# EAGLE board Lynx Joystick 7A (EAGLE 7.5.0)
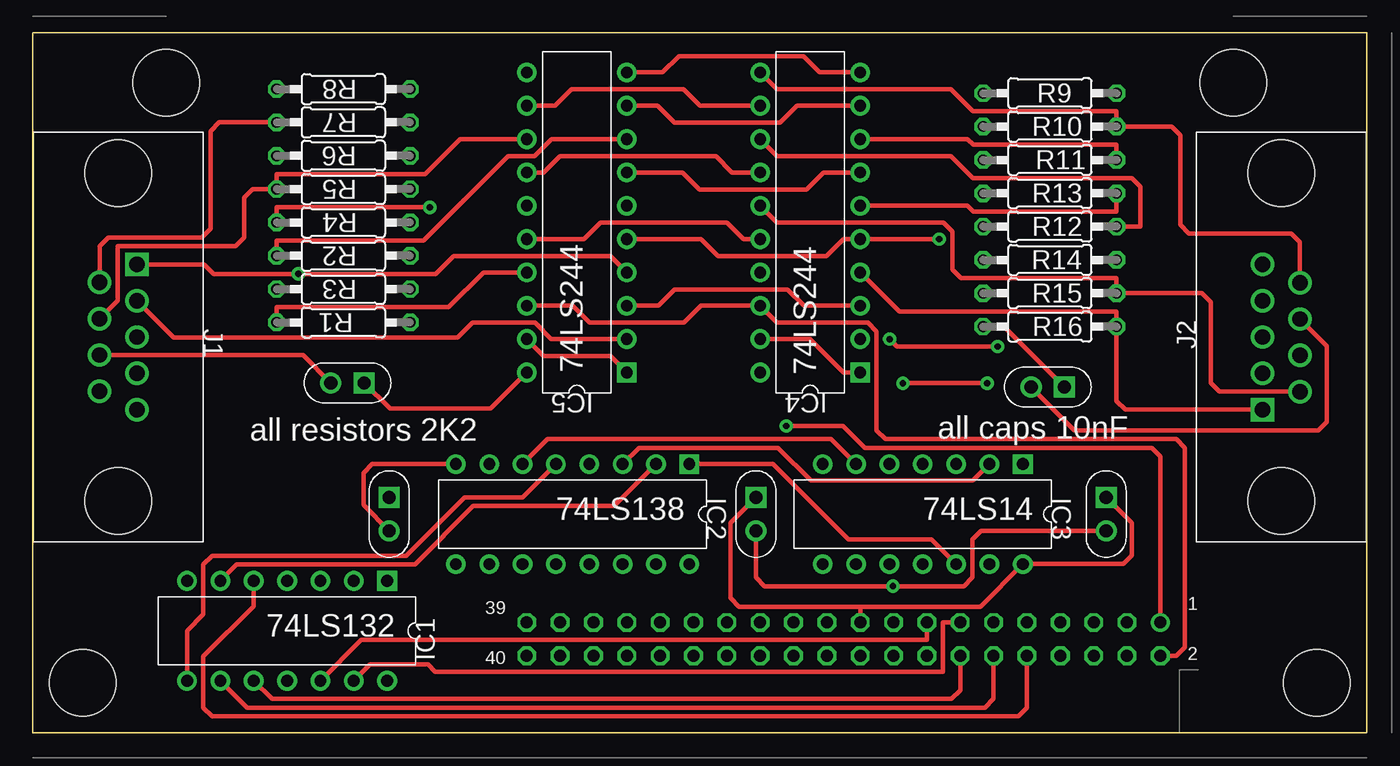
[diagram p0: board, top side]
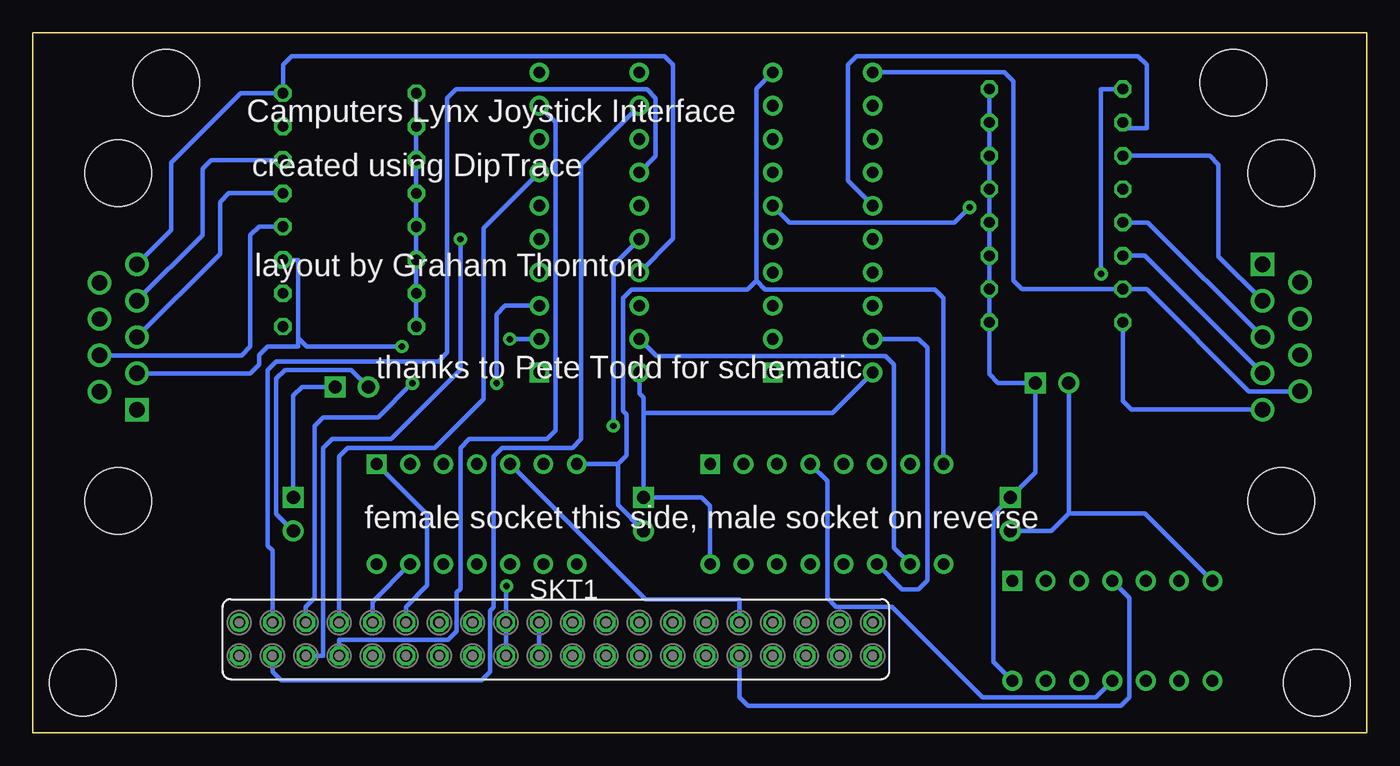
[diagram p1: board, bottom side, seen from below]

Size 101.6 x 53.34 mm. Coordinates in mm from the lower left corner, seen from the top.
Outline: 0,53.34 101.6,53.34 101.6,0 0,0 0,53.34
Copper layers (1*16): Top 0.035mm / dielectric 1.5mm / Bottom 0.035mm
Design rules "default *": minimum track width 10mil, minimum drill 0.61mm, track to track 8mil, track to pad 8mil, pad to pad 8mil, via to via 8mil, smd to smd 8mil, copper to edge 40mil, drill to drill 8mil, minimum pad ring 0mil, minimum via ring 8mil, stop-mask expansion 2mil, vias tented up to drill 19mil, thermal gap 10mil
Net classes: 0 default: width 0.33 mm, clearance 0.33 mm
Holes 5.08 mm at 97.79,3.81 3.81,3.81 10.16,49.53 91.44,49.53

## Footprints (pad centres in the part's own frame; a part is rotated, then mirrored left to right if it is on the bottom)
CAP-2.54/6.6x3 = drill 1 pad 1.6 square: 1 -1.27,0 | drill 1 pad 1.6: 2 1.27,0
DIP-14 = drill 0.9 pad 1.5 square: 1 -3.81,7.62 | drill 0.9 pad 1.5: 2 -3.81,5.08; 3 -3.81,2.54; 4 -3.81,0; 5 -3.81,-2.54; 6 -3.81,-5.08; 7 -3.81,-7.62; 8 3.81,-7.62; 9 3.81,-5.08; 10 3.81,-2.54; 11 3.81,0; 12 3.81,2.54; 13 3.81,5.08; 14 3.81,7.62
DIP-16 = drill 0.9 pad 1.5 square: 1 -3.81,8.89 | drill 0.9 pad 1.5: 2 -3.81,6.35; 3 -3.81,3.81; 4 -3.81,1.27; 5 -3.81,-1.27; 6 -3.81,-3.81; 7 -3.81,-6.35; 8 -3.81,-8.89; 9 3.81,-8.89; 10 3.81,-6.35; 11 3.81,-3.81; 12 3.81,-1.27; 13 3.81,1.27; 14 3.81,3.81; 15 3.81,6.35; 16 3.81,8.89
DIP-20 = drill 0.9 pad 1.5 square: 1 -3.81,11.43 | drill 0.9 pad 1.5: 2 -3.81,8.89; 3 -3.81,6.35; 4 -3.81,3.81; 5 -3.81,1.27; 6 -3.81,-1.27; 7 -3.81,-3.81; 8 -3.81,-6.35; 9 -3.81,-8.89; 10 -3.81,-11.43; 11 3.81,-11.43; 12 3.81,-8.89; 13 3.81,-6.35; 14 3.81,-3.81; 15 3.81,-1.27; 16 3.81,1.27; 17 3.81,3.81; 18 3.81,6.35; 19 3.81,8.89; 20 3.81,11.43
DB9M = drill 1.168 pad 1.778 square: 1 -5.537,1.422 | drill 1.168 pad 1.778: 2 -2.769,1.422; 3 0,1.422; 4 2.769,1.422; 5 5.537,1.422; 6 -4.166,-1.422; 7 -1.397,-1.422; 8 1.372,-1.422; 9 4.14,-1.422 | hole 5.08: 12.497,0; -12.497,0
0207/10 = drill 0.813 pad 1.321 octagon: 1 -5.08,0; 2 5.08,0
FE20-2 = drill 0.914 pad 1.422: 1 -24.13,1.27 | drill 0.914 pad 1.422 octagon: 2 -24.13,-1.27; 3 -21.59,1.27; 4 -21.59,-1.27; 5 -19.05,1.27; 6 -19.05,-1.27; 7 -16.51,1.27; 8 -16.51,-1.27; 9 -13.97,1.27; 10 -13.97,-1.27; 11 -11.43,1.27; 12 -11.43,-1.27; 13 -8.89,1.27; 14 -8.89,-1.27; 15 -6.35,1.27; 16 -6.35,-1.27; 17 -3.81,1.27; 18 -3.81,-1.27; 19 -1.27,1.27; 20 -1.27,-1.27; 21 1.27,1.27; 22 1.27,-1.27; 23 3.81,1.27; 24 3.81,-1.27; 25 6.35,1.27; 26 6.35,-1.27; 27 8.89,1.27; 28 8.89,-1.27; 29 11.43,1.27; 30 11.43,-1.27; 31 13.97,1.27; 32 13.97,-1.27; 33 16.51,1.27; 34 16.51,-1.27; 35 19.05,1.27; 36 19.05,-1.27; 37 21.59,1.27; 38 21.59,-1.27; 39 24.13,1.27; 40 24.13,-1.27

## Placement (x,y rotation side)
C1  CAP  [CAP-2.54/6.6x3]  27.15,16.67 270 top
C2  CAP  [CAP-2.54/6.6x3]  55.09,16.67 270 top
C3  CAP  [CAP-2.54/6.6x3]  81.76,16.67 270 top
C4  CAP  [CAP-2.54/6.6x3]  77.31,26.35 180 top
C5  CAP  [CAP-2.54/6.6x3]  23.97,26.67 180 top
IC1  DM74LS132N  [DIP-14]  19.37,7.78 270 top
IC2  DM74LS138N  [DIP-16]  41.12,16.67 270 top
IC3  DM74LS14N  [DIP-14]  67.79,16.67 270 top
IC4  DM74LS244N  [DIP-20]  59.21,38.89 180 top
IC5  DM74LS244N  [DIP-20]  41.43,38.89 180 top
J1  DB9M  [DB9M]  6.51,30.16 270 top
J2  DB9M  [DB9M]  95.09,30.16 90 top
R1  2K2  [0207/10]  23.65,31.27 180 top
R2  2K2  [0207/10]  23.65,36.35 180 top
R3  2K2  [0207/10]  23.65,33.81 180 top
R4  2K2  [0207/10]  23.65,38.89 180 top
R5  2K2  [0207/10]  23.65,41.43 180 top
R6  2K2  [0207/10]  23.65,43.97 180 top
R7  2K2  [0207/10]  23.65,46.51 180 top
R8  2K2  [0207/10]  23.65,49.05 180 top
R9  2K2  [0207/10]  77.47,48.74 0 top
R10  2K2  [0207/10]  77.47,46.2 0 top
R11  2K2  [0207/10]  77.47,43.66 0 top
R12  2K2  [0207/10]  77.47,38.58 0 top
R13  2K2  [0207/10]  77.47,41.12 0 top
R14  2K2  [0207/10]  77.47,36.04 0 top
R15  2K2  [0207/10]  77.47,33.5 0 top
R16  2K2  [0207/10]  77.47,30.96 0 top
SKT1  FE20-2  [FE20-2]  61.75,7.14 0 bottom

## Library data of the parts
C1-C5 J1 J2 R1-R16 = common
IC1 = common; DATASHEET: http://datasheets.diptrace.com/fairchild/DM74LS132.pdf; MANUFACTURER: Fairchild
IC2 IC3 = common; MANUFACTURER: National Semiconductor
IC4 IC5 = common; DATASHEET: http://datasheets.diptrace.com/fairchild/DM74LS244.pdf; MANUFACTURER: Fairchild
SKT1 = common; OC_FARNELL: unknown; OC_NEWARK: unknown

## Nets
Net_0: C1.2 C2.2 C3.2 C4.2 C5.2 IC1.7 IC2.8 IC3.7 IC4.10 IC5.10 J1.8 J2.8 SKT1.17 SKT1.18
Net_1: IC1.13 SKT1.13
Net_2: IC5.4 J1.1 R8.2
Net_3: IC5.2 J1.2 R6.2
Net_4: IC5.6 J1.3 R4.2
Net_5: IC5.8 J1.4 R2.2
Net_6: IC5.15 J1.6 R7.2
Net_7: IC5.17 J1.5 R1.2
Net_8: IC5.13 J1.7 R5.2
Net_9: IC5.11 J1.9 R3.2
Net_10: IC4.2 J2.2 R14.2
Net_11: IC4.4 J2.1 R16.2
Net_12: IC4.6 J2.3 R13.2
Net_13: IC4.8 J2.4 R11.2
Net_14: IC4.17 J2.5 R9.2
Net_15: IC4.15 J2.6 R15.2
Net_16: IC4.13 J2.7 R12.2
Net_17: IC4.12 IC5.12 SKT1.4
Net_18: IC4.16 IC5.16 SKT1.1
Net_19: IC4.18 IC5.18 SKT1.2
Net_20: IC4.14 IC5.14 SKT1.3
Net_21: IC4.11 J2.9 R10.2
Net_22: IC4.3 IC5.3 SKT1.5
Net_23: IC4.5 IC5.5 SKT1.6
Net_24: IC4.7 IC5.7 SKT1.7
Net_25: IC4.9 IC5.9 SKT1.8
Net_26: IC2.11 IC5.1 IC5.19
Net_27: IC2.10 IC4.1 IC4.19
Net_28: IC1.12 SKT1.15
Net_30: IC1.9 SKT1.12
Net_31: IC1.10 SKT1.14
Net_32: IC1.4 SKT1.32
Net_33: IC1.5 SKT1.10
Net_34: IC1.11 IC2.4
Net_35: IC1.8 IC2.5
Net_36: IC1.6 IC2.2
Net_37: IC3.13 SKT1.9
Net_38: IC3.5 SKT1.31
Net_39: IC3.1 SKT1.11
Net_40: IC2.6 IC3.6
Net_41: IC2.3 IC3.2
Net_42: IC2.1 IC3.12
VCC: C1.1 C2.1 C3.1 C4.1 C5.1 IC1.14 IC2.16 IC3.14 IC4.20 IC5.20 R1.1 R2.1 R3.1 R4.1 R5.1 R6.1 R7.1 R8.1 R9.1 R10.1 R11.1 R12.1 R13.1 R14.1 R15.1 R16.1 SKT1.19 SKT1.20

## Tracks (layer width: path | path; a pad name or v marks a point on that pad's centre or on a via)
Net_0  (via drill 0.49 pad 1.02)
  Top 0.33: C4.2 79.35,23.04 97.9,23.04 98.56,23.7 98.56,29.49 J2.8 | C3.2 72.23,15.4 71.57,14.74 71.57,11.84 70.91,11.18 v65.51,11.18 55.75,11.18 55.09,11.84 C2.2 | C5.2 20.59,28.78 6.48,28.78 6.47,28.79 J1.8 | IC2.8 25.85,20.48 25.19,19.82 25.19,17.35 C1.2 | IC5.10 47.98,50.32 49.22,51.57 58.68,51.57 59.93,50.32 IC4.10
  Bottom 0.33: SKT1.18 SKT1.17 65.56,11.12 v65.51,11.18 | IC2.8 32.23,33.13 32.89,33.79 45.83,33.79 46.49,34.45 | 46.49,34.45 47.15,33.79 55.99,33.79 56.65,33.13 56.65,24.52 56.38,24.26 56.38,21.14 57.04,20.48 | 57.04,20.48 57.04,17.35 C2.2 | C4.2 77.34,27.65 82.39,27.65 83.05,26.99 83.05,16.69 C3.2 | C1.2 24.02,15.4 22.7,16.72 | 22.7,16.72 16.88,16.72 IC1.7 | IC5.10 46.49,49.08 46.49,34.45 | IC3.7 57.04,20.48 | C5.2 22.7,16.72 | v65.51,11.18 | 57.04,20.48
Net_1
  Top 0.33: SKT1.13 69.31,8.41 69.31,4.67 30.64,4.67 30.09,5.21 25.69,5.21 IC1.13
Net_2  (via drill 0.49 pad 1.02)
  Top 0.33: IC5.4 44,36.33 32.05,36.33 30.69,34.97 v20.24,34.97 13.77,34.97 13.04,35.7 J1.1
  Bottom 0.33: v20.24,34.97 20.24,49.05 R8.2
Net_3
  Top 0.33: J1.2 10.74,30.12 32.36,30.12 33.49,31.25 38.25,31.25 39.49,30 IC5.2
  Bottom 0.33: J1.2 11.28,36.28 11.28,43.31 11.94,43.97 R6.2
Net_4  (via drill 0.49 pad 1.02)
  Top 0.33: R4.2 18.57,40.05 v30.23,40.05
  Bottom 0.33: R4.2 16.66,38.89 J1.3 | v30.23,40.05 31.41,38.87 43.95,38.87 IC5.6
Net_5
  Top 0.33: R2.2 18.57,37.51 29.76,37.51 36.2,43.95 38.22,43.95 39.52,45.24 IC5.8
  Bottom 0.33: R2.2 16.89,36.35 J1.4
Net_6
  Top 0.33: R7.2 14.19,46.51 13.53,45.85 13.53,38.41 12.87,37.74 5.75,37.74 5.09,37.08 J1.6
  Bottom 0.33: R7.2 | R7.2 18.57,46.08 16.76,46.08 16.76,50.91 17.42,51.57 38.87,51.57 39.53,50.91 39.53,42.07 IC5.15
Net_7
  Top 0.33: R1.2 18.57,32.43 31.68,32.43 34.33,35.08 IC5.17
  Bottom 0.33: R1.2 18.57,25.29 17.91,24.62 J1.5
Net_8
  Top 0.33: IC5.13 32.54,45.24 29.89,42.59 18.57,42.59 R5.2 16.76,41.43 16.09,40.77 16.09,37.74 15.43,37.08 6.47,37.08 6.47,32.94 J1.7
Net_9
  Bottom 0.33: IC5.11 27.58,50.32 26.92,49.66 26.92,34.47 26.26,33.81 R3.2 16.76,33.81 8.97,26.02 J1.9
Net_10  (via drill 0.49 pad 1.02)
  Top 0.33: v73.5,29.44 65.84,29.44 v65.27,30
  Bottom 0.33: R14.2 81.39,36.04 81.39,30.1 | 81.39,30.1 81.39,29.44 83.71,29.44 84.37,28.78 84.37,28.05 85.03,27.39 J2.2 | IC4.2 v65.27,30 | 81.39,30.1 80.73,29.44 v73.5,29.44
Net_11
  Top 0.33: J2.1 83.21,24.62 82.55,25.29 R16.2 82.55,32.11 66,32.11 IC4.4
Net_12
  Top 0.33: R13.2 82.55,39.73 71.63,39.73 71.2,40.16 IC4.6
  Bottom 0.33: R13.2 86.67,41.12 87.34,40.46 87.34,36.5 J2.3
Net_13
  Top 0.33: R11.2 82.55,44.81 71.63,44.81 71.2,45.24 IC4.8
  Bottom 0.33: R11.2 88,43.66 88.66,43 88.66,37.94 J2.4
Net_14
  Bottom 0.33: J2.5 91.06,38.31 91.06,43.46 85.79,48.74 R9.2 82.55,50.91 81.89,51.57 53.5,51.57 52.84,50.91 52.84,37.65 IC4.17
Net_15
  Top 0.33: IC4.15 56.7,38.87 69.38,38.87 70.03,38.21 70.03,35.31 70.69,34.65 82.55,34.65 R15.2 89.05,33.5 89.71,32.84 89.71,26.67 90.38,26 J2.6
Net_16
  Top 0.33: R12.2 84.37,38.58 84.37,41.61 83.71,42.27 71.59,42.27 69.91,43.95 56.7,43.95 IC4.13
  Bottom 0.33: R12.2 84.37,38.58 85.03,37.92 85.03,29.44 85.71,28.77 J2.7
Net_17
  Top 0.33: IC4.12 50.81,47.78 49.57,49.03 41.02,49.03 39.77,47.78 IC5.12
  Bottom 0.33: IC4.12 59.84,43.35 59.84,22.38 60.5,21.72 65.86,21.72 66.52,21.06 66.52,9.56 66.77,9.3 66.77,4.67 67.43,4.01 82.68,4.01 83.34,4.67 SKT1.4
Net_18  (via drill 0.49 pad 1.02)
  Top 0.33: v57.38,23.39 61.7,23.39 63.37,21.72 85.22,21.72 85.88,21.06 SKT1.1 | IC4.16 54.12,37.62 52.88,38.87 43.24,38.87 41.99,37.62 IC5.16
  Bottom 0.33: IC4.16 57.38,35.64 v57.38,23.39
Net_19
  Top 0.33: IC5.18 41.11,32.54 42.4,31.25 49.58,31.25 50.88,32.54 IC4.18 56.7,31.25 63.61,31.25 64.27,30.59 64.27,23.04 64.93,22.38 87.09,22.38 87.75,21.72 87.75,6.53 87.09,5.87 SKT1.2
Net_20
  Top 0.33: IC4.14 53.27,42.7 52.02,43.95 40.15,43.95 38.91,42.7 IC5.14
  Bottom 0.33: IC4.14 54.16,43.95 54.16,48.37 54.82,49.03 69.38,49.03 70.03,48.37 70.03,28.97 70.69,28.31 83.05,28.31 83.71,27.65 83.71,14.26 83.34,13.89 SKT1.3
Net_21
  Top 0.33: IC4.11 56.7,49.03 69.91,49.03 71.59,47.35 82.55,47.35 R10.2 86.75,46.2 87.41,45.54 87.41,38.72 88.07,38.05 95.85,38.05 96.51,37.39 J2.9
Net_22  (via drill 0.49 pad 1.02)
  Top 0.33: v72.69,26.64 v66.28,26.64 | IC4.3 58.72,32.54 57.47,33.79 48.88,33.79 47.64,32.54 IC5.3
  Bottom 0.33: IC4.3 65.61,32.54 66.28,31.88 v66.28,26.64 | v72.69,26.64 75.31,24.03 79.47,24.03 80.13,23.37 80.13,10.29 80.8,9.62 SKT1.5
Net_23  (via drill 0.49 pad 1.02)
  Top 0.33: IC5.5 50.91,37.62 52.2,36.33 60.47,36.33 61.76,37.62 IC4.5 v69.03,37.62
  Bottom 0.33: v69.03,37.62 69.03,27.68 74.32,22.38 78.81,22.38 79.47,21.72 79.47,5.87 SKT1.6
Net_24
  Top 0.33: IC4.7 60.24,42.7 58.94,41.41 50.79,41.41 49.49,42.7 IC5.7
  Bottom 0.33: IC4.7 67.28,38.45 67.28,25.46 71.01,21.72 77.6,21.72 78.26,21.06 SKT1.7
Net_25
  Top 0.33: IC4.9 58.21,47.78 56.92,46.49 48.89,46.49 47.6,47.78 IC5.9
  Bottom 0.33: IC4.9 61.78,46.54 61.78,23.04 62.44,22.38 68.37,22.38 69.03,21.72 69.03,10.97 69.31,10.69 69.31,7.74 69.97,7.08 78.26,7.08 SKT1.8
Net_26
  Top 0.33: IC5.19 38.92,28.71 44,28.71 IC5.1
  Bottom 0.33: IC5.19 34.13,30 33.47,29.34 33.47,11.61 34.13,10.95 35.4,10.95 IC2.11
Net_27
  Top 0.33: IC4.19 59.19,30 61.73,27.46 IC4.1
  Bottom 0.33: IC4.19 54.11,28.71 36.67,28.71 36.01,28.05 36.01,14.1 IC2.10
Net_28
  Top 0.33: SKT1.15 68.1,7.08 25.02,7.08 IC1.12
Net_30
  Top 0.33: SKT1.12 73.18,2.58 72.52,1.92 16.34,1.92 IC1.9
Net_31
  Top 0.33: SKT1.14 70.64,3.24 69.98,2.58 18.22,2.58 IC1.10
Net_32
  Bottom 0.33: SKT1.32 47.78,2.72 47.12,2.06 18.73,2.06 18.07,2.72 18.07,10.29 IC1.4
Net_33
  Top 0.33: SKT1.10 75.72,1.92 75.06,1.26 13.65,1.26 12.99,1.92 12.99,5.82 16.83,9.66 IC1.5
Net_34
  Bottom 0.33: IC2.4 41.09,19.18 41.09,10.28 40.43,9.62 36.15,9.62 29.25,2.72 20.61,2.72 IC1.11
Net_35
  Top 0.33: IC2.5 37.31,17.94 32.89,17.94 28.44,13.49 13.65,13.49 12.99,12.83 12.99,9.02 11.75,7.78 IC1.8
Net_36
  Top 0.33: IC1.6 15.53,12.83 29.1,12.83 33.55,17.28 44.27,17.28 IC2.2
Net_37
  Bottom 0.33: SKT1.9 75.72,10 IC3.13
Net_38
  Bottom 0.33: SKT1.31 47.78,10.17 54.94,10.17 IC3.5
Net_39
  Bottom 0.33: SKT1.11 73.18,9.62 71.57,11.23 71.57,16.64 IC3.1
Net_40
  Top 0.33: IC2.6 39.21,22.38 60.8,22.38 IC3.6
Net_41
  Top 0.33: IC2.3 46.17,21.72 56.77,21.72 59.26,19.23 71.62,19.23 IC3.2
Net_42
  Top 0.33: IC2.1 56.38,20.48 62.12,14.74 68.45,14.74 IC3.12
VCC
  Top 0.33: C2.1 53.13,15.98 53.13,10.28 53.79,9.62 63.02,9.62 | 63.02,9.62 72.17,9.62 IC3.14 83.05,12.86 83.71,13.52 83.71,15.98 C3.1 | R16.1 73.98,30.96 C4.1 | IC5.20 34.88,24.71 27.2,24.71 C5.1 | SKT1.19 63.02,9.62 | SKT1.19
  Bottom 0.33: C4.1 81.1,26.35 81.76,25.69 C3.1 | IC4.20 55.4,25.87 55.09,25.55 55.09,24.39 | 55.09,24.39 C2.1 50.67,17.94 50.01,17.28 IC2.16 | R8.1 R7.1 R6.1 R5.1 R4.1 R2.1 R3.1 R1.1 28.73,27.33 28.07,26.67 C5.1 25.24,19.84 C1.1 28.44,16.64 28.44,5.42 IC1.14 | IC5.20 40.7,24.39 55.09,24.39 | R16.1 R15.1 R14.1 R12.1 R13.1 R11.1 R10.1 R9.1 | SKT1.19 SKT1.20

## Text on the board
tPlace: R8 | R9 | R7 | R10 | R6 | R11 | R5 | R13 | R4 | R12 | R2 | R14 | R3 | R15 | J1 | R1 | R16 | J2 | 74LS244 | 74LS244 | IC5 | IC4 | all resistors 2K2 | all caps 10nF | 74LS138 | IC2 | 74LS14 | IC3 | 39 / / 40 | 1 / / 2 | 74LS132 | IC1
bPlace: Camputers Lynx Joystick Interface | created using DipTrace | layout by Graham Thornton | thanks to Pete Todd for schematic | female socket this side, male socket on reverse | SKT1